# Altium PCB TissuePad_PCB.PcbDoc
Units mm, origin at the board's own origin, x right, y up, seen from the top; angles counter-clockwise.
Board outline 83.5 x 104.25 mm, 2 copper layers (Top Layer, Bottom Layer); 29 components, 26 nets, 126 pads, 49 vias.
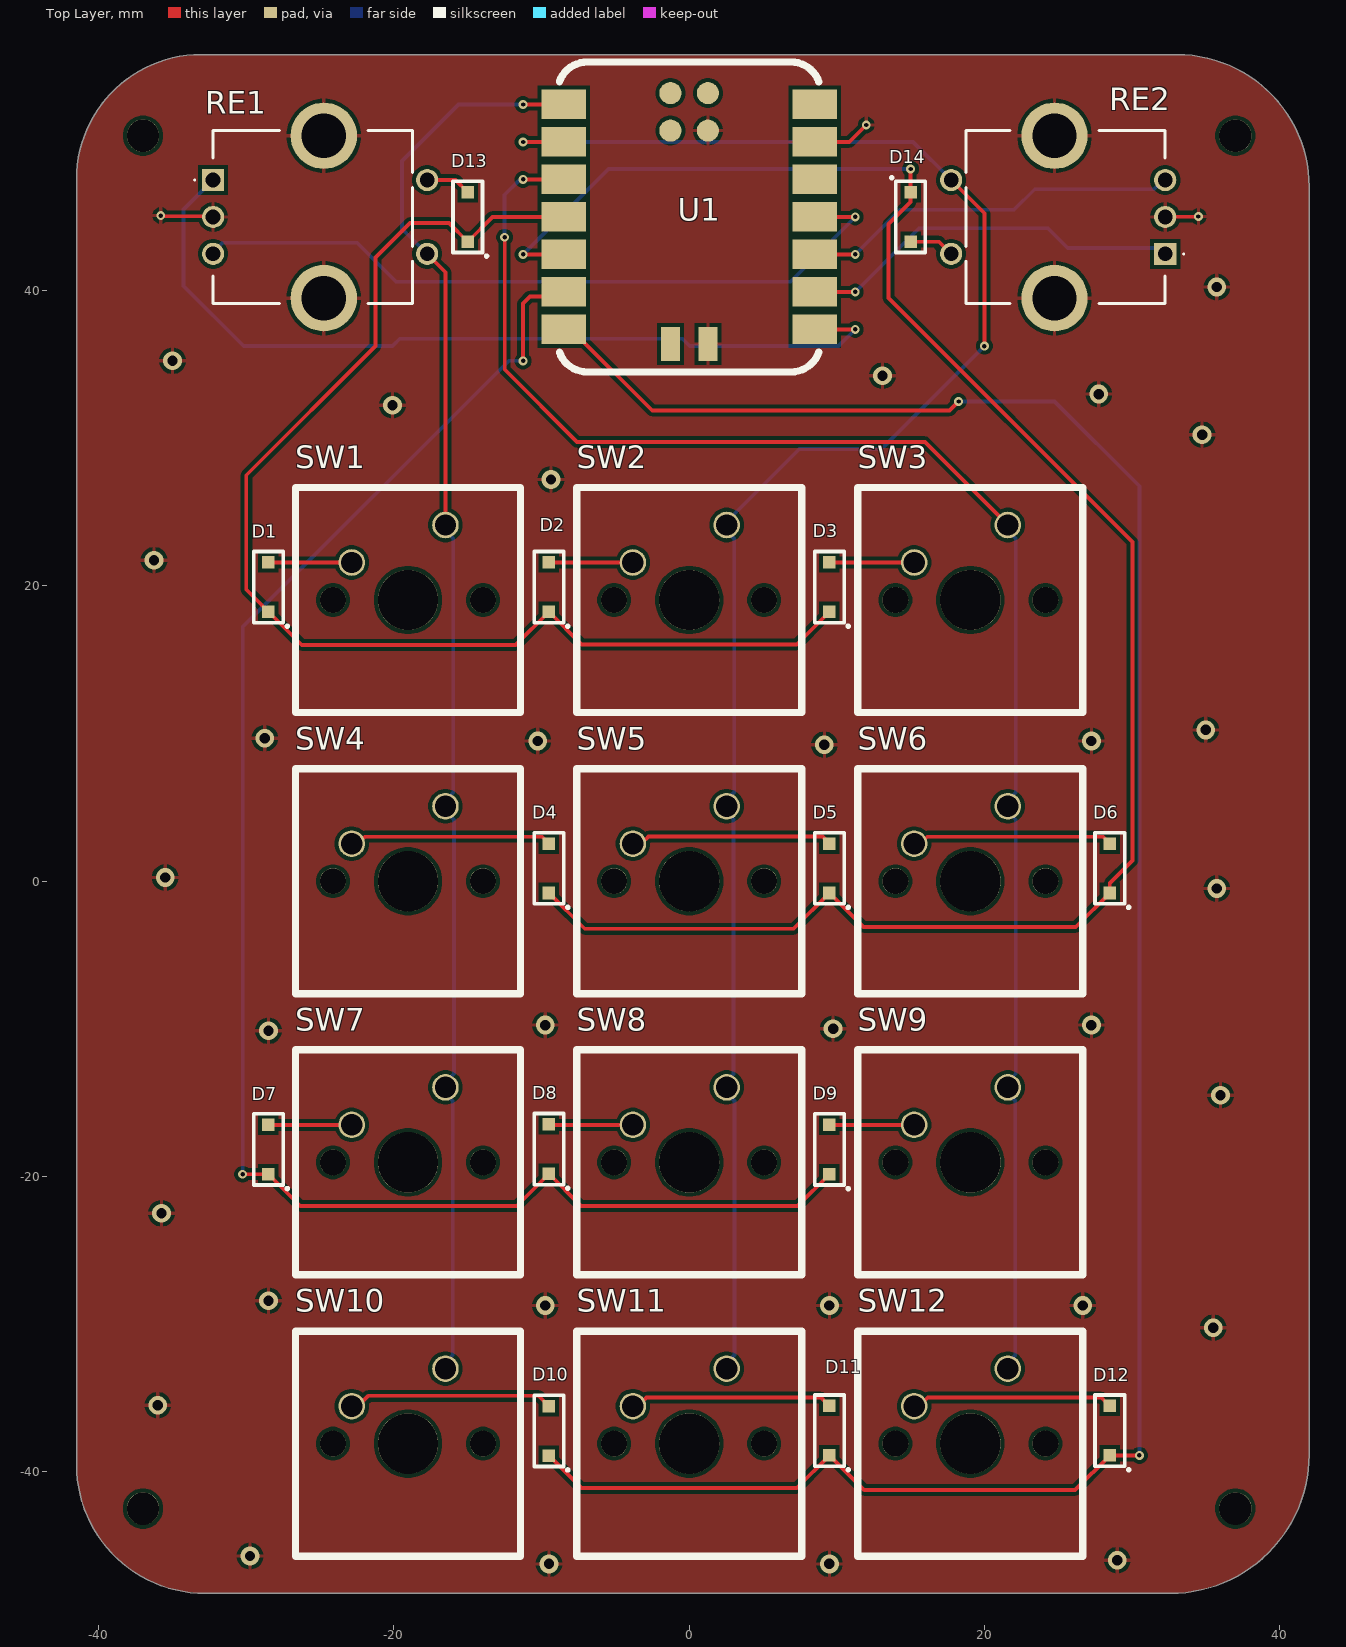
[diagram p0: Top Layer view]
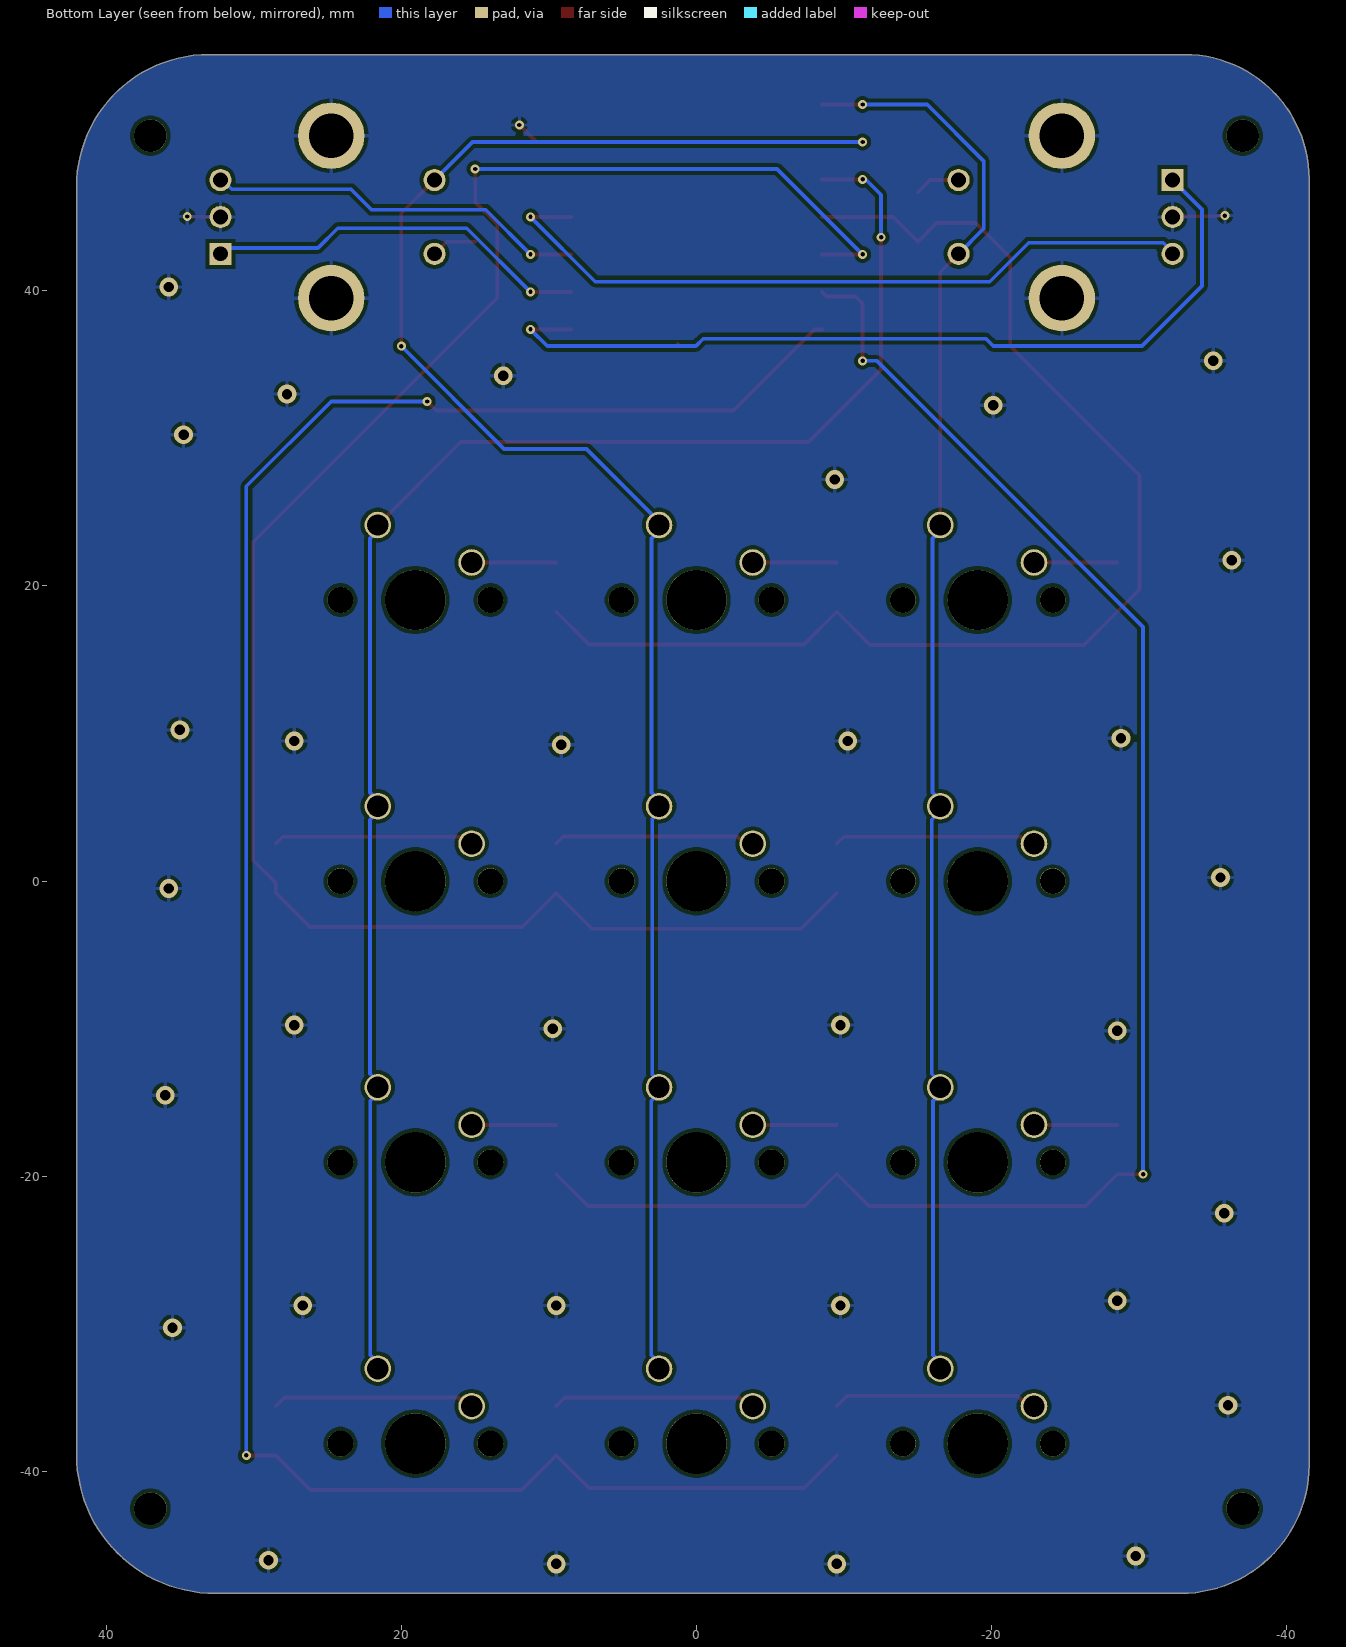
[diagram p1: Bottom Layer view, seen from below]
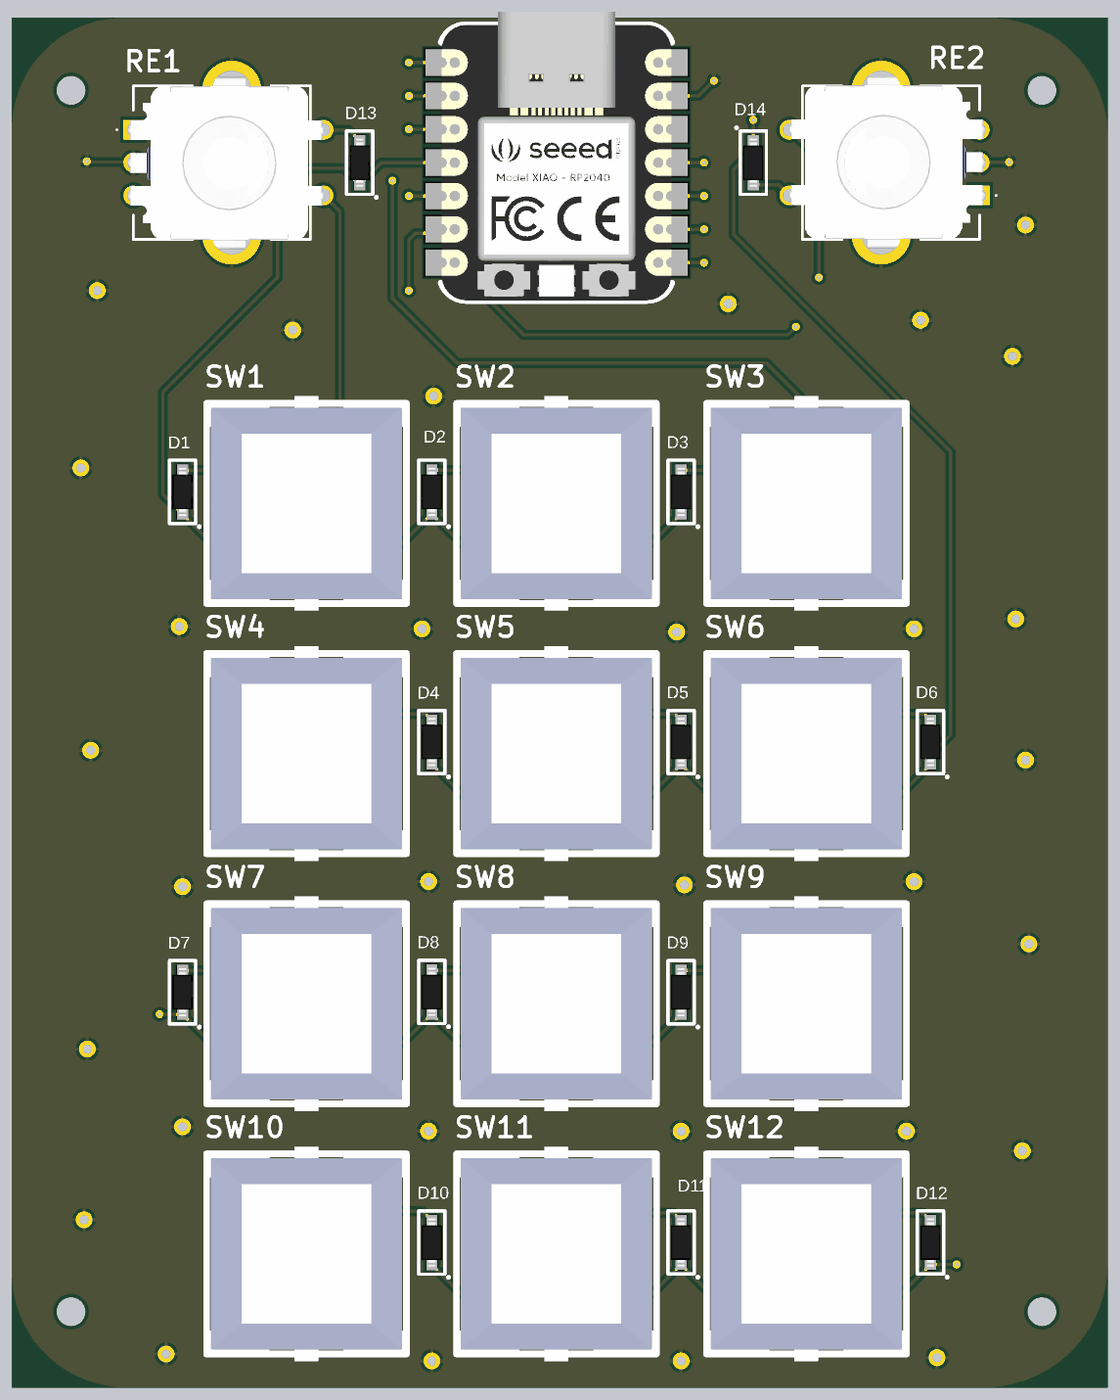
[diagram p2: 3D render of the assembled board from above, using the file's embedded part models]

## Layer stack, top to bottom
Top Solder: solder mask 0.0102, Solder Resist, Dk 3.5
Top Layer: signal copper 0.0356
Dielectric 1: dielectric 0.32, FR-4, Dk 4.8
Bottom Layer: signal copper 0.0356
Bottom Solder: solder mask 0.0102, Solder Resist, Dk 3.5

## Board outline
-32.791,-48.25 32.598,-48.25 ccw(c32.598,-38.848) 42,-38.848 42,47.043 ccw(c33.043,47.043) 33.043,56 -33.055,56 ccw(c-33.055,47.555) -41.5,47.555 -41.5,-39.541 ccw(c-32.791,-39.541)

## Design rules (kind name [scope] priority, off if disabled: settings)
Clearance [All] p1: gap=0.254 ignorepadtopadclearanceinfootprint=FALSE
HoleSize [All] p1: absolutevalues=TRUE maxlimit=10 minlimit=0.025 maxpercent=80.000 minpercent=20.000
PolygonConnect [All] p1: connectstyle=Relief reliefconductorwidth=0.254 reliefentries=4 polygonreliefangle="90 Angle" airgapwidth=0.254
RoutingVias [All] p1: holewidth=0.711 width=1.27 viastyle="Through Hole" minholewidth=0.711 minwidth=1.27 maxholewidth=0.711 maxwidth=1.27
SolderMaskExpansion [All] p1: expansion=0 istentingtop=FALSE
SupplyNets "Schematic Supply Nets_1" [InNet('GND')] p1: voltage=0.000
Width [All] p1: maxlimit=0.254 minlimit=0.254 preferedwidth=0.254
29 further rules are at their usual default settings.

## Components (designator, comment, footprint, x,y, rotation, side; value= is the part's Value field where it differs from the comment)
D1 "1N4148" 1N4148W -28.5,19.927 r270 top
D2 "1N4148" 1N4148W -9.5,19.927 r270 top
D3 "1N4148" 1N4148W 9.5,19.927 r270 top
D4 "1N4148" 1N4148W -9.5,0.877 r270 top
D5 "1N4148" 1N4148W 9.5,0.877 r270 top
D6 "1N4148" 1N4148W 28.5,0.877 r270 top
D7 "1N4148" 1N4148W -28.5,-18.173 r270 top
D8 "1N4148" 1N4148W -9.5,-18.15 r270 top
D9 "1N4148" 1N4148W 9.5,-18.173 r270 top
D10 "1N4148" 1N4148W -9.5,-37.235 r270 top
D11 "1N4148" 1N4148W 9.5,-37.223 r270 top
D12 "1N4148" 1N4148W 28.5,-37.223 r270 top
D13 "1N4148" 1N4148W -15,45 r270 top
D14 "1N4148" 1N4148W 15,45 r90 top
RE1 "EC11" EC11E18244AU -25,45 r270 top
RE2 "EC11" EC11E18244AU 25,45 r90 top
SW1 "Cherry_MX_Switch" "Cherry MX 2 Pin" -19.05,19.05 r0 top
SW2 "Cherry_MX_Switch" "Cherry MX 2 Pin" 0,19.05 r0 top
SW3 "Cherry_MX_Switch" "Cherry MX 2 Pin" 19.05,19.05 r0 top
SW4 "Cherry_MX_Switch" "Cherry MX 2 Pin" -19.05,0 r0 top
SW5 "Cherry_MX_Switch" "Cherry MX 2 Pin" 0,0 r0 top
SW6 "Cherry_MX_Switch" "Cherry MX 2 Pin" 19.05,0 r0 top
SW7 "Cherry_MX_Switch" "Cherry MX 2 Pin" -19.05,-19.05 r0 top
SW8 "Cherry_MX_Switch" "Cherry MX 2 Pin" 0,-19.05 r0 top
SW9 "Cherry_MX_Switch" "Cherry MX 2 Pin" 19.05,-19.05 r0 top
SW10 "Cherry_MX_Switch" "Cherry MX 2 Pin" -19.05,-38.1 r0 top
SW11 "Cherry_MX_Switch" "Cherry MX 2 Pin" 0,-38.1 r0 top
SW12 "Cherry_MX_Switch" "Cherry MX 2 Pin" 19.05,-38.1 r0 top
U1 "XIAO_RP2040" XIAO_RP2040 0,45 r0 top

## Footprints (in the part's own frame and the unit in brackets; to place one, negate y for a bottom-side part, rotate by r counter-clockwise, add the part's x,y. Pads: shape width x height; smd on the part's side, far side on the other; paste and mask are expansions set on the pad)
1N4148W [mm] "Fast Switching SMD Diode"
  rect 0.85x0.85 smd mask+0.05: A(-1.675,0) K(1.675,0)
  silkscreen extent -2.41,-1 2.71,1.33, body extent -1.83,-0.77 1.83,0.77, height 1.06
"Cherry MX 2 Pin" [mil] "A Cherry MX Switch with 2 Mounting Holes"
  round 70.87 hole 57: 1(100,200) 2(-150,100)
  round 160.98 hole 161 unplated: MH1(0,0)
  round 69.02 hole 69 unplated: MH2(-200,0) MH3(200,0)
  silkscreen extent -300,-300 300,300, body extent -308,-321 308,321, height 587
EC11E18244AU [mm] "Alps 18 Pulse Incremental Mechanical Rotary Encoder with a 6 mm Flat Shaft (Not Indexed), Through Hole 10mA 5V DC"
  rect 1.5x1.5 hole 1: A(-2.5,-7.25)
  round 1.5 hole 1: B(2.5,-7.25) C(0,-7.25) D(-2.5,7.25) E(2.5,7.25)
  round 4.5 hole 3: SHIELD(-5.5,0.25) SHIELD(5.5,0.25)
  silkscreen extent -5.85,-8.55 5.85,6.25, body extent -6.51,-7.65 6.58,7.3, height 24.51
XIAO_RP2040 [mm] "Seed Studio Microcontroller, Mini and compact using the RP2040 Chip"
  rect 3x2 smd mask-2539.97: 3V3(8.5,2.54) 5V(8.5,7.62) GND(8.5,5.08) GPIO0(-8.5,-7.62) GPIO1(8.5,-7.62) GPIO2(8.5,-5.08) GPIO3(8.5,-2.54) GPIO4(8.5,0) GPIO6(-8.5,-2.54) GPIO7(-8.5,-5.08) GPIO26(-8.5,7.62) GPIO27(-8.5,5.08) GPIO28(-8.5,2.54) GPIO29(-8.5,0)
  rect 1.3x2.3 smd mask-2539.97: GND(1.27,-8.6) VIN(-1.27,-8.6)
  round 1.5 smd mask-2539.97: GND(1.27,5.85) RESET(-1.27,5.85) SWDCLK(1.27,8.39) SWDIO(-1.27,8.39)
  silkscreen extent -8.78,-10.5 8.78,10.5, body extent -8.75,-10.5 8.75,11.5, height 4.41

## Part data
D1 D2 D3 D4 D5 D6 D7 D8 D9 D10 D11 D12 D13 D14: "Small Signal Fast Switching Diodes"
RE1 RE2: "A Rotary Encoder with Push Button"
SW1 SW2 SW3 SW4 SW5 SW6 SW7 SW8 SW9 SW10 SW11 SW12: "2 Pin Cherry MX Switch"
U1: "Seed Studio XIAO_RP2040 MCU Board"

## Free pads (board coordinates)
  round 2.2 hole 2.2 unplated: 3(-37,50.5) 4(-37,-42.5) 5(37,-42.5) 6(37,50.5)

## Via types
v1: diameter 1.27, hole 0.7, Top Layer to Bottom Layer, 31 vias
v2: diameter 0.6, hole 0.3, Top Layer to Bottom Layer, 18 vias

## Nets (pads, with @x,y where several pads share a name; then routed paths per layer and width w, separated by ;. In a path a pad name is that pad's centre, name@x,y a point inside that pad or via, vN(x,y) a via of type N, cw(c..) or ccw(c..) an arc to the next point about the centre after c; other vN are vias at no path point)
A_1: RE1.A U1.GPIO1 | length 58.8
  Top Layer w0.254: U1.GPIO1 v2(11.25,37.38)
  Bottom Layer w0.254: RE1.A -34.25,45.5 -34.25,40.323 -30.177,36.25 -20.102,36.25 -19.602,36.75 -0.454,36.75 0.046,36.25 10.12,36.25 v2(11.25,37.38)
A_2: RE2.A U1.GPIO2 | length 26.4
  Top Layer w0.254: U1.GPIO2 v2(11.25,39.92) v2@11.316,39.986
  Bottom Layer w0.254: v2(11.25,39.92) 15.566,44.236 24.305,44.236 25.653,42.888 31.862,42.888 RE2.A
B_1: RE1.B U1.GPIO4 | length 49.5
  Top Layer w0.254: U1.GPIO4 v2(11.25,45)
  Bottom Layer w0.254: RE1.B -32.25,42.611 -31.611,43.25 -22.5,43.25 -19.866,40.616 6.866,40.616 v2(11.25,45)
B_2: RE2.B U1.GPIO3 | length 25.9
  Top Layer w0.254: U1.GPIO3 v2(11.25,42.46) v2@11.283,42.493
  Bottom Layer w0.254: v2(11.25,42.46) 14.277,45.487 22.016,45.487 23.406,46.877 31.484,46.877 32.107,47.5 RE2.B
"COL 0": RE1.E SW1.1 SW4.1 SW7.1 SW10.1 U1.GPIO26 | length 96.1
  Top Layer w0.254: RE1.E -16.505,41.255 -16.505,24.135 SW1.1 ; v2(-11.25,52.62) U1.GPIO26
  Bottom Layer w0.254: RE1.E -19.45,44.2 -19.45,48.8 -15.63,52.62 v2(-11.25,52.62) ; SW10.1 -16.51,-32.602 -16.013,-32.105 -16.013,-14.885 -16.51,-14.388 SW7.1 ; SW7.1@-16.51,-13.62 -15.938,-13.048 -15.938,4.158 -16.51,4.73 SW4.1 ; SW4.1@-16.51,5.48 -15.988,6.002 -15.988,23.208 -16.51,23.73 SW1.1
"COL 1": RE2.E SW2.1 SW5.1 SW8.1 SW11.1 U1.GPIO27 | length 125.2
  Top Layer w0.254: v2(-11.25,50.08) U1.GPIO27 ; RE2.E 20,45.25 v2(20,36.25)
  Bottom Layer w0.254: v2(-11.25,50.08) 15.17,50.08 RE2.E ; SW11.1 2.54,-32.623 3.065,-32.098 3.065,-14.892 SW8.1@2.54,-14.367 ; SW8.1 2.54,-13.552 3.009,-13.083 3.009,4.193 SW5.1@2.54,4.662 ; SW5.1 2.54,5.495 3.047,6.002 3.047,23.208 2.54,23.715 SW2.1 2.54,24.37 7.458,29.287 13.037,29.287 v2(20,36.25)
"COL 2": SW3.1 SW6.1 SW9.1 SW12.1 U1.GPIO28 | length 112.4
  Top Layer w0.254: v2@-12.5,43.61 -12.5,34.658 -7.592,29.75 15.97,29.75 SW3.1 ; v2(-11.25,47.54) U1.GPIO28
  Bottom Layer w0.254: v2(-12.502,43.626) -12.502,46.508 -11.536,47.474 -11.316,47.474 v2(-11.25,47.54) ; SW12.1 21.59,-32.607 22.099,-32.098 22.099,-14.892 21.59,-14.383 SW9.1 ; SW9.1@21.59,-13.58 22.121,-13.048 22.121,4.158 21.59,4.69 SW6.1 ; SW6.1@21.59,5.47 22.121,6.002 22.121,23.208 21.59,23.74 SW3.1
D1: D1.A SW1.2 | length 5.6
  Top Layer w0.254: D1.A -28.489,21.59 SW1.2
D2: D2.A SW2.2 | length 5.7
  Top Layer w0.254: D2.A D2.A -9.487,21.59 SW2.2
D3: D3.A SW3.2 | length 5.7
  Top Layer w0.254: D3.A 9.511,21.59 SW3.2
D4: D4.A SW4.2 | length 13.8
  Top Layer w0.254: SW4.2 -22.442,2.54 -21.964,3.017 -9.966,3.017 D4.A
D5: D5.A SW5.2 | length 13.7
  Top Layer w0.254: SW5.2 -3.514,2.836 -2.933,2.836 -2.748,3.02 9.031,3.02 D5.A
D6: D6.A SW6.2 | length 13.6
  Top Layer w0.254: SW6.2 15.658,2.54 16.131,3.012 28.039,3.012 D6.A
D7: D7.A SW7.2 | length 5.6
  Top Layer w0.254: D7.A -28.489,-16.51 SW7.2
D8: D8.A SW8.2 | length 6
  Top Layer w0.254: D8.A -9.465,-16.51 -3.935,-16.51 SW8.2@-3.75,-16.325 ; SW8.2 SW8.2@-3.81,-16.385
D9: D9.A SW9.2 | length 5.7
  Top Layer w0.254: D9.A 9.511,-16.51 SW9.2
D10: D10.A SW10.2 | length 13.9
  Top Layer w0.254: SW10.2 -22.442,-35.56 -21.748,-34.866 -10.194,-34.866 D10.A
D11: D11.A SW11.2 | length 13.8
  Top Layer w0.254: SW11.2 -3.475,-35.56 -2.888,-34.973 8.925,-34.973 D11.A
D12: D12.A SW12.2 | length 13.7
  Top Layer w0.254: SW12.2 15.572,-35.56 16.162,-34.97 27.922,-34.97 D12.A
D13: D13.A RE1.D | length 3.1
  Top Layer w0.254: RE1.D -15.825,47.5 D13.A
D14: D14.A RE2.D | length 3.1
  Top Layer w0.254: D14.A 16.925,43.325 17.663,42.587 17.75,42.587 RE2.D
GND: RE1.C RE1.SHIELD RE2.C RE2.SHIELD U1.GND | length 9.9
  Top Layer w0.254: v2(-35.797,45.095) -35.75,45.047 -32.297,45.047 RE1.C ; U1.GND@1.25,36.38 U1.GND@1.27,36.4 ; U1.GND@8.5,50.08 10.85,50.08 v2(12,51.23) ; RE2.C 32.266,45.016 34.484,45.016 v2(34.5,45.032)
  other v1: -9.5,-46.25 9.5,-46.25 29,-46 -29.75,-45.72 -36,-35.5 35.5,-30.25 -9.75,-28.75 9.5,-28.75 26.67,-28.75 -28.5,-28.423 -35.75,-22.5 36,-14.5 -28.5,-10.135 9.75,-10 -9.75,-9.75 27.25,-9.75 35.75,-0.5 -35.5,0.25 9.16,9.25 -10.25,9.5 27.25,9.5 -28.75,9.677 35,10.25 -36.25,21.75 -9.36,27.215 34.75,30.25 -20.102,32.25 27.75,33 13.096,34.25 -35,35.25 35.75,40.25
"ROW 0": D1.K D2.K D3.K D13.K U1.GPIO29 | length 84.9
  Top Layer w0.254: U1.GPIO29 -13.325,45 D13.K -16.261,44.586 -18.914,44.586 -21.25,42.25 -21.25,36.25 -30,27.5 -30,19.752 D1.K -26.244,15.995 -11.756,15.995 D2.K -7.284,16.036 7.284,16.036 D3.K
"ROW 1": D4.K D5.K D6.K D14.K U1.GPIO6 | length 130.6
  Top Layer w0.254: v2(-11.25,42.46) -11.25,42.446 -11.248,42.444 -11.232,42.46 U1.GPIO6 ; D4.K -7.074,-3.224 7.074,-3.224 D5.K 11.811,-3.109 26.189,-3.109 D6.K 28.5,-0.123 30.028,1.404 30.028,22.972 13.5,39.5 13.5,44.513 15,46.013 v2(15,48.25)
  Bottom Layer w0.254: v2(-11.25,42.46) -5.46,48.25 v2@15.006,48.25 ; v2(15,48.25) v2@15.006,48.25 ; v2@15.052,48.204 v2@15.006,48.25
"ROW 2": D7.K D8.K D9.K U1.GPIO7 | length 113.8
  Top Layer w0.254: v2(-30.25,-19.848) D7.K -26.349,-22 -11.675,-22 D8.K -7.325,-22 7.348,-22 D9.K ; v2(-11.25,35.25) -11.25,39.145 -10.782,39.614 -8.806,39.614 U1.GPIO7
  Bottom Layer w0.254: v2(-30.25,-19.848) -30.25,17.221 -12.221,35.25 v2(-11.25,35.25)
"ROW 3": D10.K D11.K D12.K U1.GPIO0 | length 153.3
  Top Layer w0.254: D10.K -7.303,-41.107 7.291,-41.107 D11.K 11.853,-41.251 26.147,-41.251 D12.K v2(30.5,-38.898) ; U1.GPIO0 -8,37.38 -2.506,31.886 17.636,31.886 v2(18.25,32.5)
  Bottom Layer w0.254: v2(18.25,32.5) 24.75,32.5 30.5,26.75 v2(30.5,-38.898)
pads on no net: SW1.MH1 SW1.MH2 SW1.MH3 SW2.MH1 SW2.MH2 SW2.MH3 SW3.MH1 SW3.MH2 SW3.MH3 SW4.MH1 SW4.MH2 SW4.MH3 SW5.MH1 SW5.MH2 SW5.MH3 SW6.MH1 SW6.MH2 SW6.MH3 SW7.MH1 SW7.MH2 SW7.MH3 SW8.MH1 SW8.MH2 SW8.MH3 SW9.MH1 SW9.MH2 SW9.MH3 SW10.MH1 SW10.MH2 SW10.MH3 SW11.MH1 SW11.MH2 SW11.MH3 SW12.MH1 SW12.MH2 SW12.MH3 U1.3V3 U1.5V U1.RESET U1.SWDCLK U1.SWDIO U1.VIN

## Polygon pours and split planes (outlines as drawn)
GND on Bottom Layer "GND_L02_P003" (solid, pour order 3): -32.791,-48.25 32.598,-48.25 ccw(c32.598,-38.848) 42,-38.848 42,47.043 ccw(c33.043,47.043) 33.043,56 -33.055,56 ccw(c-33.055,47.555) -41.5,47.555 -41.5,-39.541 ccw(c-32.791,-39.541)
GND on Top Layer "GND_L01_P002" (solid, pour order 2): -32.791,-48.25 32.598,-48.25 ccw(c32.598,-38.848) 42,-38.848 42,47.043 ccw(c33.043,47.043) 33.043,56 -33.055,56 ccw(c-33.055,47.555) -41.5,47.555 -41.5,-39.541 ccw(c-32.791,-39.541)

## Dimensions
33.043,56 to 32.598,-48.25 on Mechanical 16
-41.5,47.555 to 42,47.043 on Mechanical 16